# Altium PCB UNOshield.PcbDoc
Units mil, origin at the board's own origin, x right, y up, seen from the top; angles counter-clockwise.
Board outline 2700 x 2100 mil, 2 copper layers (Top Layer, Bottom Layer); 41 components, 67 nets, 164 pads, 38 vias.
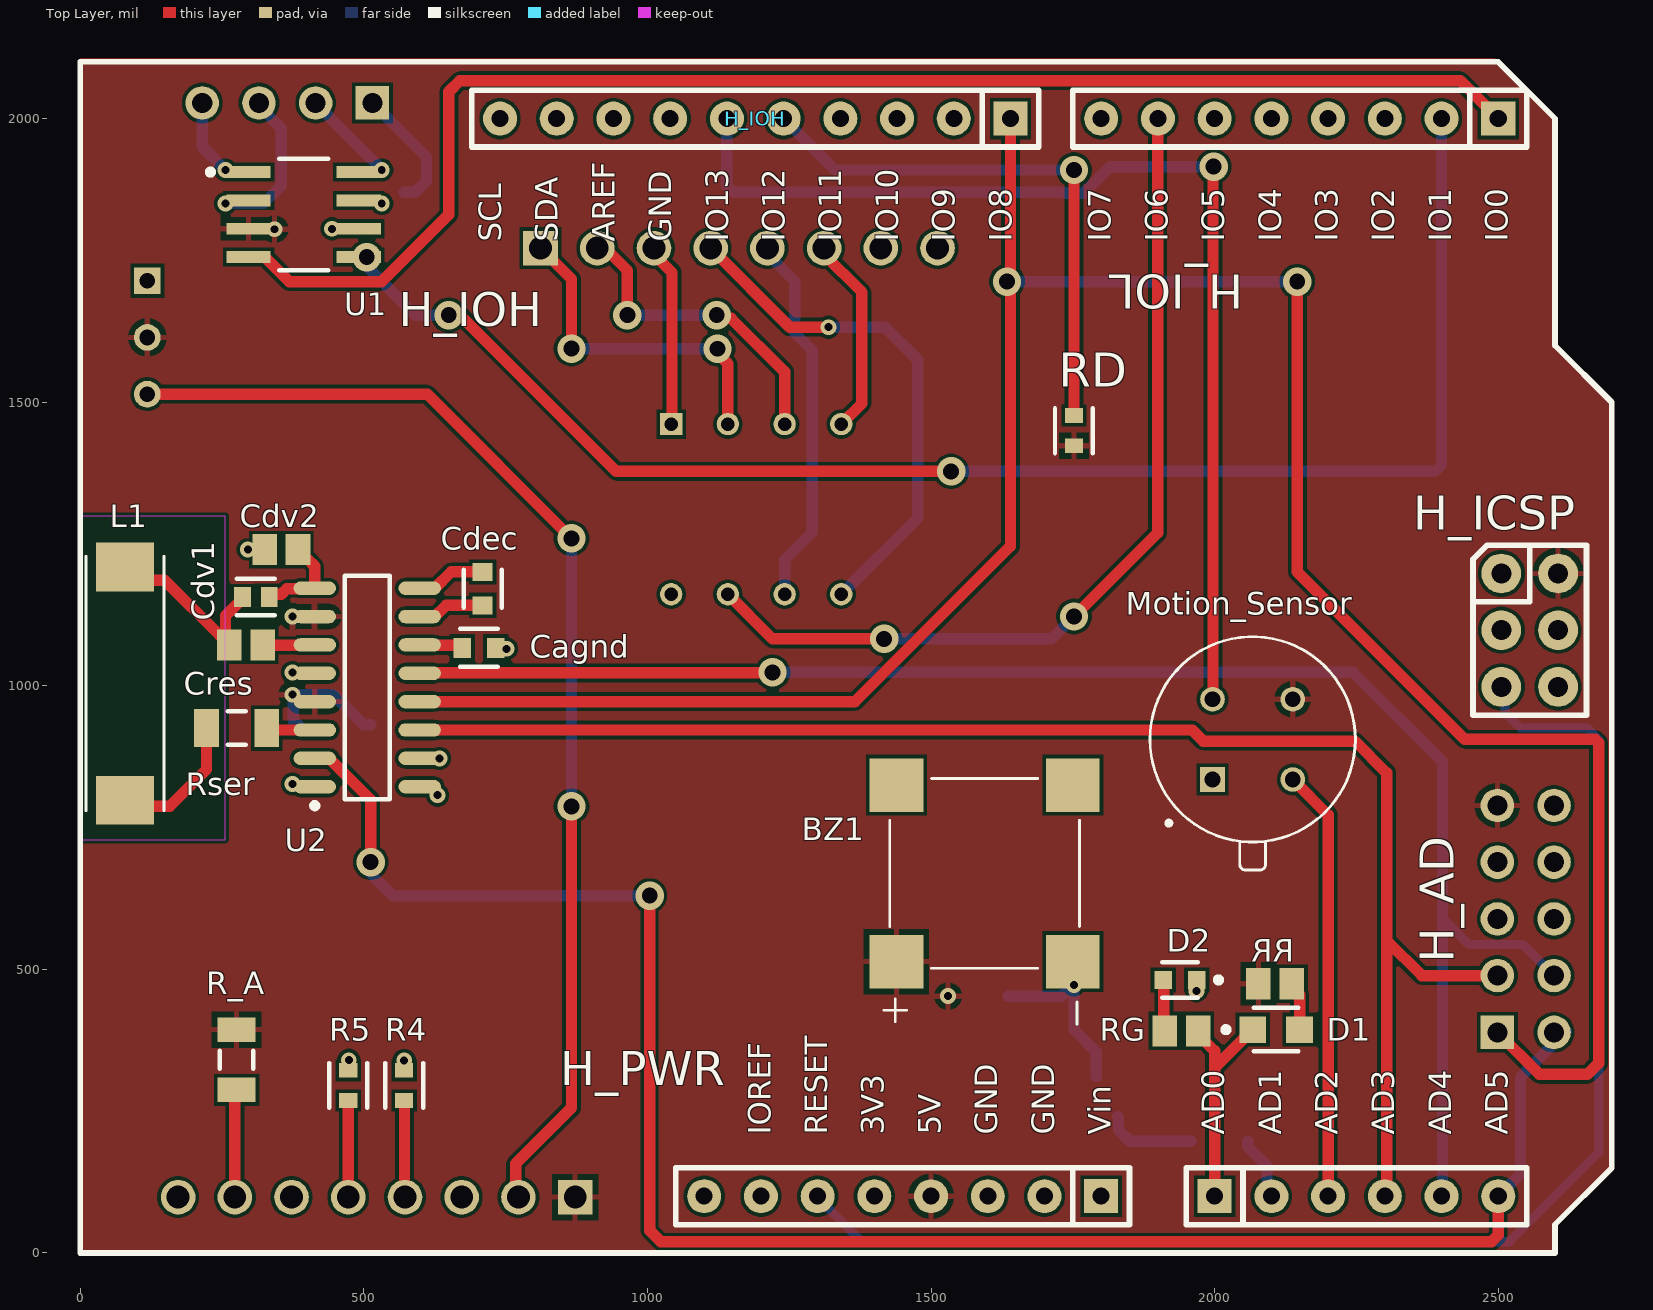
[diagram p0: Top Layer view]
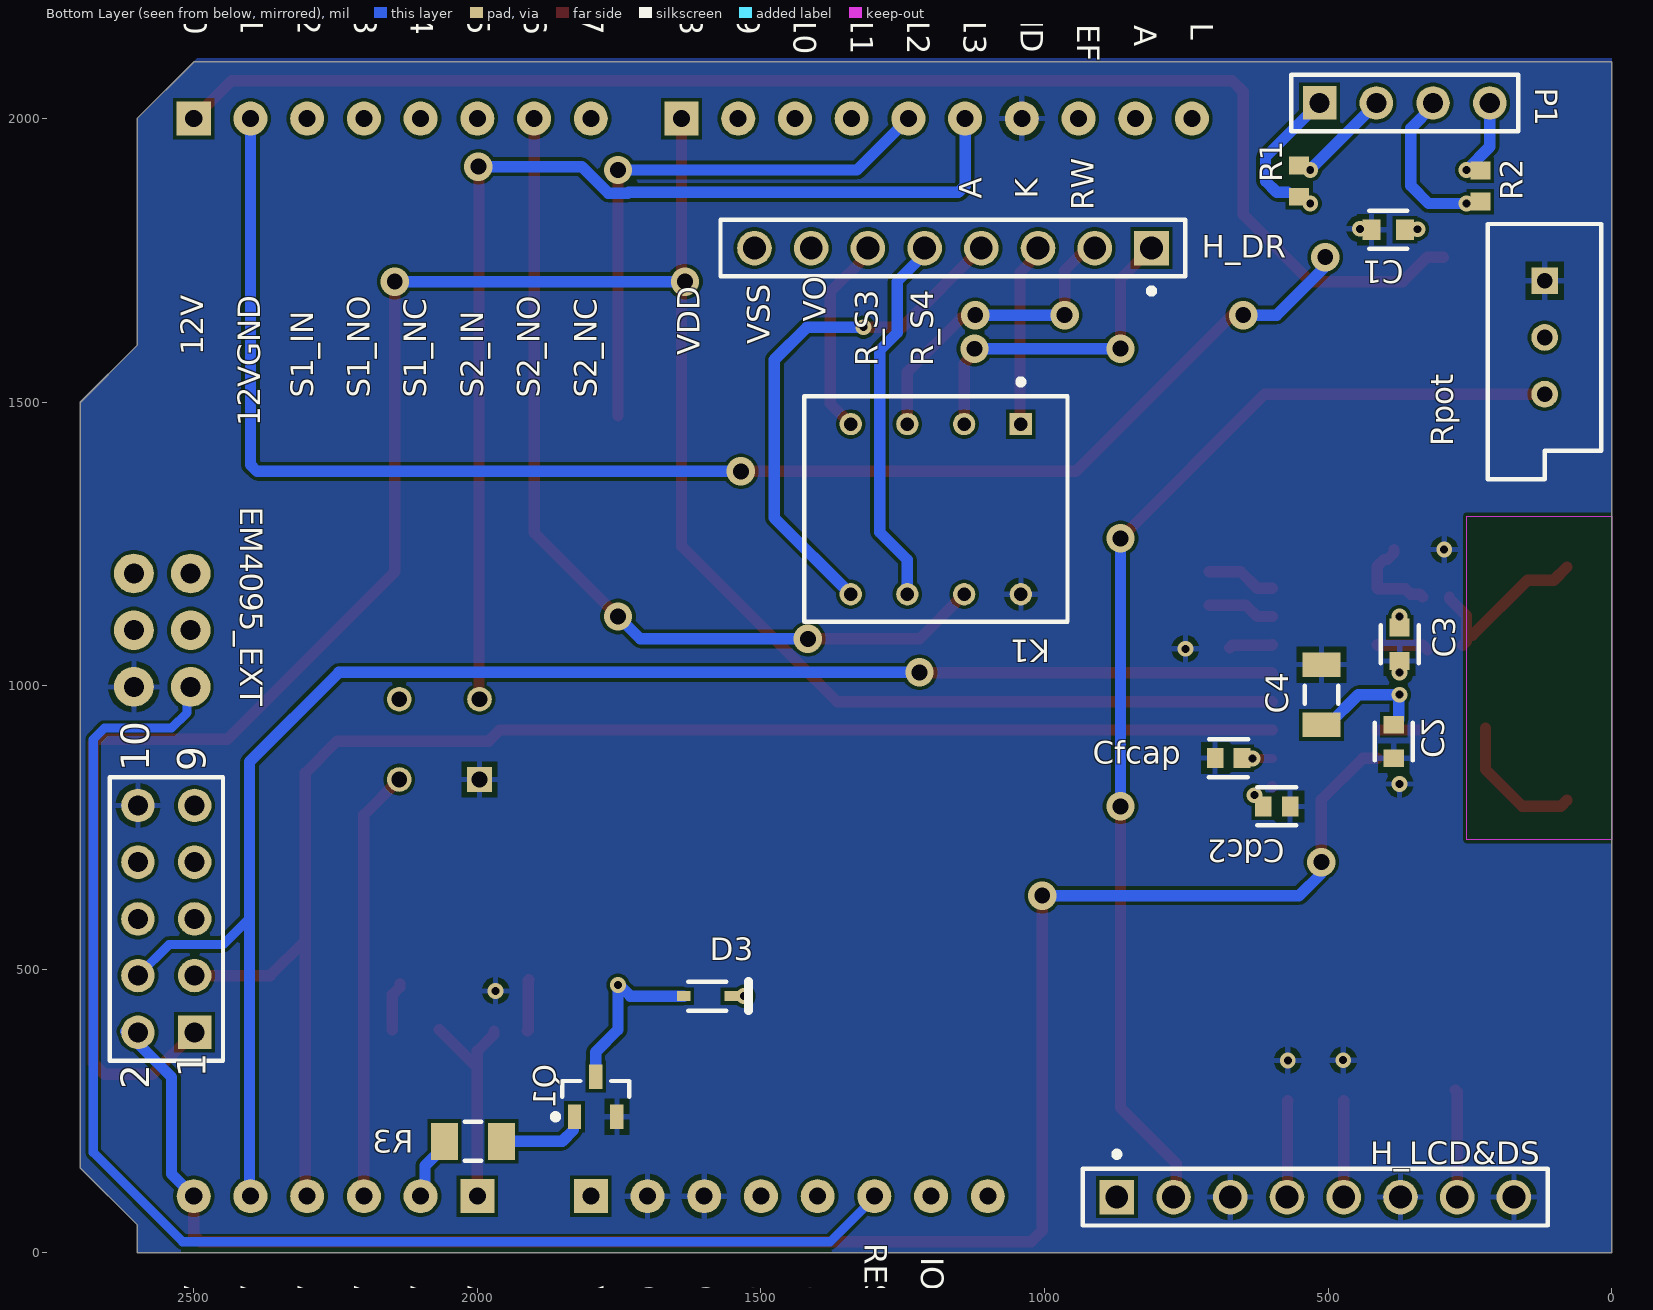
[diagram p1: Bottom Layer view, seen from below]
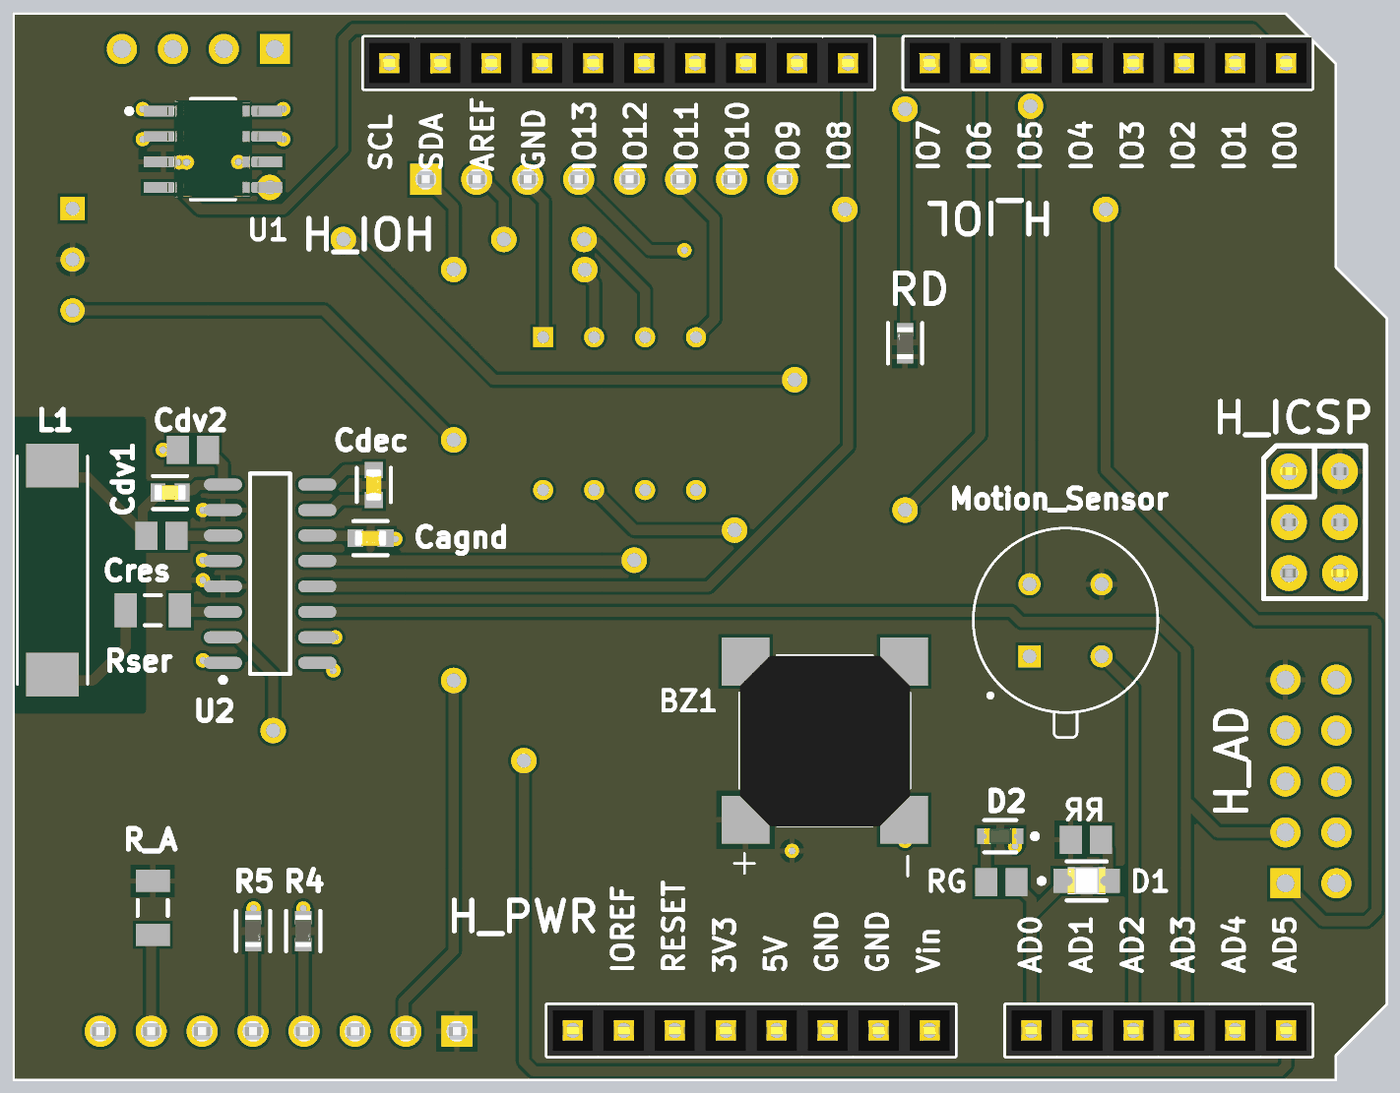
[diagram p2: 3D render of the assembled board from above, using the file's embedded part models]

## Layer stack, top to bottom
Top Solder: solder mask 0.4, Solder Resist, Dk 3.5
Top Layer: signal copper 1.4
Dielectric1: dielectric 12.6, FR-4, Dk 4.8
Bottom Layer: signal copper 1.4
Bottom Solder: solder mask 0.4, Solder Resist, Dk 3.5

## Board outline
0,0 0,2100 2500,2100 2600,2000 2600,1600 2700,1500 2700,150 2600,50 2600,0

## Design rules (kind name [scope] priority, off if disabled: settings)
Clearance [All] p1: gap=6 ignorepadtopadclearanceinfootprint=FALSE
HoleSize [All] p1: absolutevalues=TRUE maxlimit=100 minlimit=10 maxpercent=80.000 minpercent=20.000
PolygonConnect [All] p1: connectstyle=Relief reliefconductorwidth=10 reliefentries=4 polygonreliefangle="90 Angle" airgapwidth=10
RoutingVias [All] p1: holewidth=28 width=50 viastyle="Through Hole" minholewidth=10 minwidth=28 maxholewidth=50 maxwidth=50
SilkToSolderMaskClearance SilkscreenOverComponentPads [IsPad] p1: minsilkscreentomaskgap=10 clearancetoexposedcopper=TRUE
SolderMaskExpansion [All] p1: expansion=0 istentingtop=FALSE
SupplyNets "Schematic Supply Nets_3" [InNet('GND(12V)')] p1: voltage=0.000
SupplyNets "Schematic Supply Nets_1" [InNet('+12')] p2: voltage=0.000
SupplyNets "Schematic Supply Nets_2" [InNet('5V')] p3: voltage=0.000
SupplyNets "Schematic Supply Nets" [InNet('GND')] p4: voltage=0.000
Width [All] p1: maxlimit=1000 minlimit=6 preferedwidth=10 minimp=50.000000 maximp=50.000000 favimp=50.000000
28 further rules are at their usual default settings.

## Classes and differential pairs
component class EM4095: C2 C3 C4 Cagnd Cdc2 Cdec Cdv1 Cdv2 Cfcap Cres EM4095_EXT L1 Rser U2
component class MAX490: C1 P1 R1 R2 U1
component class UNOshield: BZ1 D1 D2 D3 H_AD H_DR H_ICSP H_IOH H_IOL H_LCD&DS H_PWR K1 Motion_Sensor Q1 R3 R4 R5 R_A RD RG Rpot RR

## Components (designator, comment, footprint, x,y, rotation, side; value= is the part's Value field where it differs from the comment)
BZ1 "SMT-0823-S-R" XDCR_SMT-0823-S-R 1594.49,669.29 r90 top
C1 "Bypass Capacitor" FP-CC0603-DA-MFG 393.7,1804.04 r0 bottom value="100 nF"
C2 "Bypass Capacitor" FP-CC0603-DA-MFG 384.22,901.72 r270 bottom value="100 nF"
C3 "Bypass Capacitor" FP-CC0603-DA-MFG 373.77,1073.38 r270 bottom value="100 nF"
C4 "Bypass Capacitor" C1206 511.81,984.25 r90 bottom value=100pF
Cagnd "Decoupling" FP-CC0603-DA-MFG 702.91,1066.88 r0 top value="100 nF"
Cdc2 "10nF" FP-C0603C-CF-MFG 590.55,787.4 r180 bottom value="10,000 pF"
Cdec "" FP-CC0603-DA-MFG 709.27,1171.37 r90 top value="100 nF"
Cdv1 "CBR06C729BAGAC" FP-CBR06C-MFG 309.56,1156.46 r0 top value="7.2 pF"
Cdv2 "" C0805 354.33,1240.16 r0 top value=680pF
Cfcap "10nF" FP-C0603C-CF-MFG 675.53,872.44 r0 bottom value="10,000 pF"
Cres "" C0805 292.37,1071.69 r180 top value=680pF
D1 "LS R976-NR-1" FP-LS_R976-MFG 2108.43,393.7 r0 top
D2 "LTST-C191KGKT" FP-LTST-C191KGKT-MFG 1938.79,481.46 r180 top
D3 "1N4148WS-7-F" DIOD-SOD323-2-A_V 1594.49,452.76 r180 bottom
EM4095_EXT "Header 5X2" HDR2X5 2498.43,388.98 r90 bottom
H_AD "AD" "Header 6x1 8.5mm" 2000,100 r0 top locked
H_DR "Header Door Relay" SLIN-PPPC081LFBN-RC_V 1161.42,1771.65 r0 bottom
H_ICSP "ICSP" ICSP 2505.51,1198.03 r0 top locked
H_IOH "IOH" "Header 10x1 8.5mm" 1640,2000 r180 top locked
H_IOL "IOL" "Header 8x1 8.5mm" 2500,2000 r180 top locked
H_LCD&DS "Header LCD & Door Sensor" SLIN-PPPC081LFBN-RC_V 522.44,98.43 r180 bottom
H_PWR "POWER_UNO" "Header 8x1 8.5mm" 1800,100 r180 top locked
K1 "Relay-DPDT" DIP-P8 1191.73,1311.42 r0 bottom
L1 "B82450A2364A000" INDM11435X240N 78.74,1003.94 r270 top
Motion_Sensor "PYQ_1548/7660" TO254P940H440-4 2066.93,905.51 r90 top
P1 "Header 4" HDR1X4 514.96,2027.56 r180 bottom
Q1 "NX7002AK,215" NXP-SOT23_L 1791.34,275.59 r90 bottom
R1 "" 1608[0603] 551.18,1889.76 r270 bottom value=120
R2 "" 1608[0603] 231.54,1881.11 r270 bottom value=120
R3 "RMCF1206FT10R0" FP-RMCF1206-IPC_C 2007.87,196.85 r180 bottom
R4 "10k" FP-RC0603-0_55-IPC_C 570.87,295.28 r270 top
R5 "10k" FP-RC0603-0_55-IPC_C 472.44,295.28 r270 top
R_A "Res1" C1206 275.59,340.55 r90 top value=220 (schematic designator R_a)
RD "10k" FP-RC0603-0_55-IPC_C 1751.97,1449.74 r90 top
RG "Res1" C0805 1941.23,391.4 r0 top value=150
Rpot "RPot" VR5 118.11,1614.17 r270 bottom value=10k
RR "Res1" C0805 2106.75,474.57 r180 top value=150
Rser "Res1" C1206 275.59,925.2 r0 top value=10
U1 "MAX490ESA+" FP-S8-2-MFG 393.7,1830.71 r0 top
U2 "EM4095HMSO16B+" SOIC16_L 505.91,997.05 r0 top

## Footprints (in the part's own frame and the unit in brackets; to place one, negate y for a bottom-side part, rotate by r counter-clockwise, add the part's x,y. Pads: shape width x height; smd on the part's side, far side on the other; paste and mask are expansions set on the pad)
1608[0603] [mm] "Chip Capacitor, Body 1.6x0.8mm, IPC High Density"
  rect 0.8x0.9 smd: 1(-0.7,0) 2(0.7,0)
  body extent -0.87,-0.48 0.87,0.48, height 1.3
C0805 [mm] "Chip Capacitor, Body 2.0x1.3mm, IPC High Density"
  rect 1.1x1.4 smd: 1(-0.75,0) 2(0.75,0)
  body extent -1.1,-0.72 1.1,0.72, height 1.4
C1206 [mm] "Chip Capacitor, Body 3.2x1.6mm, IPC High Density"
  rect 1.1x1.7 smd: 1(-1.35,0) 2(1.35,0)
  silkscreen extent -0.4,-0.75 0.4,0.75, body extent -1.7,-0.9 1.7,0.9, height 1.3
DIOD-SOD323-2-A_V [mm] "SOD-323, 2-Leads, Body 1.7x1.3mm"
  rect 0.59x0.45 smd: 1(-1.055,0) 2(1.055,0)
  silkscreen extent -0.85,-0.65 1.85,0.65, body extent -0.85,-0.65 0.85,0.65, height 1.2
DIP-P8 [mm] "Dual-Pole Dual-Throw Relay; 8 Leads"
  rect 1x1 hole 0.6: 1(-3.81,-3.81)
  round 1 hole 0.6: 2(-1.27,-3.81) 3(1.27,-3.81) 4(3.81,-3.81) 5(3.81,3.81) 6(1.27,3.81) 7(-1.27,3.81) 8(-3.81,3.81)
  silkscreen extent -5.9,-5.82 5.9,5.05
FP-C0603C-CF-MFG [mm]
  rect 0.75x0.9 smd paste+0 mask+0: 1(-0.6,0) 2(0.6,0)
  silkscreen extent -0.87,-0.85 0.88,0.85, body extent -0.8,-0.4 0.8,0.4, height 0.87
FP-CBR06C-MFG [mm]
  rect 0.75x0.9 smd paste+0 mask+0: 1(-0.6,0) 2(0.6,0)
  silkscreen extent -0.85,-0.82 0.85,0.82, body extent -0.8,-0.4 0.8,0.4, height 0.87
FP-CC0603-DA-MFG [mm]
  rect 0.8x0.9 smd paste+0 mask+0: 1(-0.75,0) 2(0.75,0)
  silkscreen extent -0.85,-0.85 0.85,0.85, body extent -0.8,-0.4 0.8,0.4, height 0.9
FP-LS_R976-MFG [mm]
  rect 1.2x1.2 smd paste+0 mask+0: 1(-1.05,0) 2(1.05,0)
  silkscreen extent -2.37,-0.97 1,0.97, body extent -0.95,-0.68 0.95,0.67, height 0.9
FP-LTST-C191KGKT-MFG [mm]
  rect 0.8x0.8 smd paste+0 mask+0: 1(-0.75,0) 2(0.75,0)
  silkscreen extent -1.85,-0.8 0.8,0.8, body extent -1.25,-0.55 1.25,0.55, height 0.25
FP-RC0603-0_55-IPC_C [mil]
  rect 25.93x31.97 smd paste+0 mask+0: 1(-26.64,0) 2(26.64,0)
  silkscreen extent -40,-33 40,33, body extent -31,-16 31,16, height 22
FP-RMCF1206-IPC_C [mil]
  rect 47.39x65.28 smd paste+0 mask+0: 1(-50.22,0) 2(50.22,0)
  silkscreen extent -15,-34 15,34, body extent -63,-31 63,31, height 28
FP-S8-2-MFG [mm]
  rect 1.98x0.53 smd paste+0 mask+0: 1(-2.465,1.905) 2(-2.465,0.635) 3(-2.465,-0.635) 4(-2.465,-1.905) 5(2.465,-1.905) 6(2.465,-0.635) 7(2.465,0.635) 8(2.465,1.905)
  silkscreen extent -4.3,-2.5 1.1,2.5, body extent -3,-2.45 3,2.45, height 1.75
HDR1X4 [mm] "Connector; Header; 4 Position"
  rect 1.5x1.5 hole 0.9: 1(0,0)
  round 1.5 hole 0.9: 2(2.54,0) 3(5.08,0) 4(7.62,0)
  silkscreen extent -1.27,-1.27 8.89,1.27
HDR2X5 [mm] "Connector; Header; 5x2 Position"
  rect 1.5x1.5 hole 0.9: 1(0,0)
  round 1.5 hole 0.9: 2(0,2.54) 3(2.54,0) 4(2.54,2.54) 5(5.08,0) 6(5.08,2.54) 7(7.62,0) 8(7.62,2.54) 9(10.16,0) 10(10.16,2.54)
  silkscreen extent -1.27,-1.27 11.43,3.81
"Header 6x1 8.5mm" [mil] "Stackable 6 pin header"
  rect 60x60 hole 30: 1(0,0)
  round 60 hole 30: 2(100,0) 3(200,0) 4(300,0) 5(400,0) 6(500,0)
  silkscreen extent -50,-50 550,50, body extent -50,-50 550,50, height 335
"Header 8x1 8.5mm" [mil] "Stackable 8 pin header"
  rect 60x60 hole 30: 1(0,0)
  round 60 hole 30: 2(100,0) 3(200,0) 4(300,0) 5(400,0) 6(500,0) 7(600,0) 8(700,0)
  silkscreen extent -50,-50 750,50, body extent -50,-50 750,50, height 335
"Header 10x1 8.5mm" [mil] "Stackable 10 pin header"
  rect 60x60 hole 30: 1(0,0)
  round 60 hole 30: 2(100,0) 3(200,0) 4(300,0) 5(400,0) 6(500,0) 7(600,0) 8(700,0) 9(800,0) 10(900,0)
  silkscreen extent -50,-50 950,50, body extent -50,-50 950,50, height 335
ICSP [mil]
  round 70 hole 35.43: 1(0,0) 2(100,0) 3(0,-100) 4(100,-100) 5(0,-200) 6(100,-200)
  silkscreen extent -50,-250 150,50, body extent -50,-250 150,50, height 485
INDM11435X240N [mm]
  rect 2.18x2.61 smd: 1(-5.22,0) 2(5.22,0)
  silkscreen extent -5.7,-1.75 5.7,1.75
NXP-SOT23_L [mm] "SOT23, 3-Leads, Body 3x1.4mm, Pitch 0.95mm, IPC High Density"
  rect 1.1x0.6 smd: 1(-0.9,0.95) 2(-0.9,-0.95) 3(0.9,0)
  silkscreen extent -1.02,-1.5 0.7,1.93, body extent -0.7,-1.5 0.7,1.5, height 1.1
SLIN-PPPC081LFBN-RC_V [mm] "THD, 8-Leads, Body 20.82x2.54mm, Pitch 2.54mm"
  rect 1.55x1.55 hole 1.02: 1(-8.89,0)
  round 1.55 hole 1.02: 2(-6.35,0) 3(-3.81,0) 4(-1.27,0) 5(1.27,0) 6(3.81,0) 7(6.35,0) 8(8.89,0)
  silkscreen extent -10.41,-1.27 10.41,2.04, body extent -10.41,-1.27 10.41,1.27, height 8.5
SOIC16_L [mm] "SOIC, 16-Leads, Body 9.9x3.9mm, Pitch 1.27mm, IPC High Density"
  oval 1.9x0.6 smd: 1(-2.35,-4.445) 2(-2.35,-3.175) 3(-2.35,-1.905) 4(-2.35,-0.635) 5(-2.35,0.635) 6(-2.35,1.905) 7(-2.35,3.175) 8(-2.35,4.445) 9(2.35,4.445) 10(2.35,3.175) 11(2.35,1.905) 12(2.35,0.635) 13(2.35,-0.635) 14(2.35,-1.905) 15(2.35,-3.175) 16(2.35,-4.445)
  silkscreen extent -2.47,-5.42 1,5, body extent -2,-5 2,5, height 1.91
TO254P940H440-4 [mm]
  rect 1.1x1.1 hole 0.7: 1(-1.796,1.796)
  round 1.1 hole 0.7: 2(-1.796,-1.796) 3(1.796,-1.796) 4(1.796,1.796)
  silkscreen extent -5.85,-4.6 4.6,4.6
VR5 [mm] "Thru-Hole; 3 Leads"
  rect 1.2x1.2 hole 0.7: 1(-2.54,0)
  round 1.2 hole 0.7: 2(0,0) 3(2.54,0)
  silkscreen extent -5.08,-2.54 6.35,2.54
XDCR_SMT-0823-S-R [mm]
  rect 2.4x2.4 smd: 3(3.95,-3.95) 4(3.95,3.95) N(-3.95,-3.95) P(-3.95,3.95)
  silkscreen extent -6.76,-4.25 4.25,4.51, body extent -4.27,-4.26 4.23,4.24, height 2.19

## Part data
BZ1: "Audio Indicator Transducer Electromagnetic 5Vp-p 70mA Solder Pad 3Vp-p 1800Hz to 2800Hz Surface Mount", Manufacturer="Projects Unlimited", Package=None, Supplier Part Number=668-1066-1-ND, Availability=Unavailable, Category="Audio Products", ComponentLink1Description=https://datasheet.ciiva.com/4625/smt-0823-s-r-71464-4625676.pdf?src-supplier=Mouser, ComponentLink1URL=https://datasheet.ciiva.com/4625/smt-0823-s-r-71464-4625676.pdf?src-supplier=Mouser, ComponentLink2Description=https://datasheet.ciiva.com/8113/smt-0823-s-r-8113345.pdf?src-supplier=Avnet, ComponentLink2URL=https://datasheet.ciiva.com/8113/smt-0823-s-r-8113345.pdf?src-supplier=Avnet, ComponentLink3Description=https://datasheet.ciiva.com/0/smt-0823-s-r-315.pdf?src-supplier=Digikey, ComponentLink3URL=https://datasheet.ciiva.com/0/smt-0823-s-r-315.pdf?src-supplier=Digikey, Manufacturer Part Number=SMT-0823-S-R, MF="PUI Audio", MP=SMT-0823-S-R, Price=None, Pricing="1=3.22, 10=2.625, 25=2.4196, 50=2.275, 100=2.1395, 250=1.97344, 500=1.85702 (USD)", RoHS=Yes, Stock=12556, Supplier=Digikey
C1 C2 C3 Cagnd Cdec: library part CMP-03422-001228-1, "CAP CER 0.1UF 10V X7R 0603", Capacitance="100 nF", Manufacturer=YAGEO, Manufacturer Part Number=CC0603KRX7R6BB104, Package=CC0603-DA, Temperature="-55°C to +125°C", Temperature Characteristic=X7R, Temperature Coefficient=15%, Temperature Range High=+125°C, Temperature Range Low=-55°C, Tolerance=0.1, Voltage="10 V", Automotive=No, Category=Cap, ComponentLink2Description=Datasheet, ComponentLink2URL=http://www.yageo.com/documents/recent/UPY-GPHC_X7R_6.3V-to-50V_18.pdf, Device Class L1="Passive Components", Device Class L2=Capacitors, Device Class L3="Ceramic Capacitors", Digikey Description="CAP CER 0.1UF 10V X7R 0603", Footprint Url=http://www.yageo.com/exep/pages/download/literatures/UPY-C_GEN_24.pdf, Height=0.9mm, Lead Free=Yes, Material=Ceramic, Mouser Description="0603 0.1 uF 10 V ±10 % Tolerance X7R SMT Multilayer Ceramic Capacitor", Octopart=https://octopart.com/cc0603krx7r6bb104-yageo-9291607, RoHS=TRUE, Voltage Rating="10 V"
C4: library part "Cap Pol1", "Tantalum Capacitor, Polarized, Tantalum (dry/solid), 16V, 10% +Tol, 10% -Tol, 10uF, Surface Mount, 1206", Capacitor Type=Tantalum, Case/Package=1206, ESR (Equivalent Series Resistance)=3R, Leakage Current=1.6uA, Manufacturer="Kyocera AVX", Manufacturer Part Number=TAJA106K016SNJ, Max Operating Temperature=125°C, Min Operating Temperature=-55°C, Package Shape=Rectangular, Package Style=SMTMeter, Rated DC Voltage (URdc)=16V, Supplier Part Number 1=478-8875-1-ND, Tolerance  (fill in as +-)=10%, Category="Tantalum Capacitors", ComponentLink1Description=https://datasheet.ciiva.com:443/pdfs/VipMasterIC/IC/AVXC/AVXC-S-A0008794508/AVXC-S-A0008794508-1.pdf?src-supplier=IHS+Markit, ComponentLink1URL=https://datasheet.ciiva.com:443/pdfs/VipMasterIC/IC/AVXC/AVXC-S-A0008794508/AVXC-S-A0008794508-1.pdf?src-supplier=IHS+Markit, ComponentLink2Description=https://datasheet.ciiva.com/29500/taj-29500092.pdf?src-supplier=Digikey, ComponentLink2URL=https://datasheet.ciiva.com/29500/taj-29500092.pdf?src-supplier=Digikey, ComponentLink3Description=https://datasheet.ciiva.com/29500/taj-29500093.pdf?src-supplier=Digikey, ComponentLink3URL=https://datasheet.ciiva.com/29500/taj-29500093.pdf?src-supplier=Digikey, ComponentLink4Description=https://datasheet.ciiva.com/29500/taj-29500094.pdf?src-supplier=Digikey, ComponentLink4URL=https://datasheet.ciiva.com/29500/taj-29500094.pdf?src-supplier=Digikey, ComponentLink5Description=https://datasheet.ciiva.com/12907/taj-27497-12907453.pdf?src-supplier=Mouser, ComponentLink5URL=https://datasheet.ciiva.com/12907/taj-27497-12907453.pdf?src-supplier=Mouser, Dielectric Material=Tantalum, Height=1.6mm, JESD-609 Code=e3, Length=3.2mm, Mounting Technology="Surface Mount", Packaging="Tape and Reel", Pins=2, Polarity=Polarized, Pricing 1="1=0.36, 10=0.214, 50=0.157, 100=0.1397, 500=0.11036, 1000=0.10132, 2500=0.09178 (USD)", Reach SVHC Compliant=Yes, Reference Standard=CECC30801-005, RoHS=Yes, RoHS Compliant=Yes, Stock 1=30440, Supplier 1=Digikey, Tan Delta=0.08, Terminal Finish=Nickel, Termination="J BEND", Tolerance (fill in as +-)=10%, Width=1.6mm
Cdc2 Cfcap: library part CMP-2006-03048-2, "CAP CER 10000PF 10V X7R 0603", Capacitance="10,000 pF", Manufacturer=KEMET, Manufacturer Part Number=C0603C103K8RACTU, Package=C0603C-CF, Temperature="-55°C to +125°C", Temperature Characteristic=X7R, Temperature Coefficient=30ppm/°C, Temperature Range High=+125°C, Temperature Range Low=-55°C, Tolerance=0.1, Voltage Rating="10 V", Automotive=Yes, Automotive Grade="Grade 1", Category=Cap, ComponentLink2Description=Datasheet, ComponentLink2URL=https://api.kemet.com/component-edge/download/datasheet/C0603C100J5GACAUTO.pdf, Device Class L1="Passive Components", Device Class L2=Capacitors, Device Class L3="Ceramic Capacitors", Digikey Description="CAP CER 10000PF 10V X7R 0603", Height=0.87mm, Lead Free=Yes, Material=Ceramic, Mouser Description="Multilayer Ceramic Capacitors MLCC - SMD/SMT 10volts 10000pF X7R 10%", Octopart=https://octopart.com/c0603c103k8ractu-kemet-8375724, RoHS=TRUE
Cdv1: library part CMP-03020-004850-1, "CBR0603 7.2 pF C0G 30ppm/°C 0.1 pF 250 V", Capacitance="7.2 pF", Capacitor Type=Ceramic, Case/Package=0603, Manufacturer=KEMET, Max Operating Temperature=125°C, Min Operating Temperature=-55°C, Package=CBR06C, Package Style=SMTMeter, Rated DC Voltage (URdc)=250V, Supplier Part Number 1=399-16240-1-ND, Temperature="-55°C to +125°C", Temperature Characteristic=C0G, Temperature Coefficient=30ppm/°C, Temperature Range High=+125°C, Tolerance="0.1 pF", Tolerance  (fill in as +-)=1.3889%, Voltage Rating="250 V", Automotive=No, Category=Cap, ComponentLink1Description=https://datasheet.ciiva.com:443/pdfs/VipMasterIC/IC/KEME/KEME-S-A0008534334/KEME-S-A0008534334-1.pdf?src-supplier=IHS+Markit, ComponentLink1URL=https://datasheet.ciiva.com:443/pdfs/VipMasterIC/IC/KEME/KEME-S-A0008534334/KEME-S-A0008534334-1.pdf?src-supplier=IHS+Markit, ComponentLink2Description=Datasheet, ComponentLink2URL=https://content.kemet.com/datasheets/KEM_C1030_CBR_SMD.pdf, ComponentLink3Description=https://datasheet.octopart.com/CBR06C729BAGAC-KEMET-datasheet-86449590.pdf?src-supplier=Element14, ComponentLink3URL=https://datasheet.octopart.com/CBR06C729BAGAC-KEMET-datasheet-86449590.pdf?src-supplier=Element14, Device Class L1="Passive Components", Device Class L2=Capacitors, Device Class L3="Ceramic Capacitors", Dielectric Material=Ceramic, Height=0.87mm, Ipc Land Pattern Name=CAPC16080X80, JESD-609 Code=e3, Lead Free=Yes, Length=1.6mm, Manufacturer Part Number=CBR06C729BAGAC, Material=Ceramic, Multilayer=Yes, Octopart=https://octopart.com/cbr06c729bagac-kemet-84758813, Packaging="Tape and Reel", Pins=2, Pricing 1="1=0.8, 10=0.501, 100=0.3498, 1000=0.27097 (USD)", Reach SVHC Compliant=Yes, RoHS=TRUE, RoHS Compliant=Yes, Stock 1=3890, Supplier 1=Digikey, Temperature Characteristics Code=C0G, Temperature Range Low=-55°C, Terminal Finish=Tin, Tolerance (fill in as +-)=1.3889%, Width=0.8mm
Cdv2 Cres: library part Cap, "Surface Mount Ceramic Multilayer Capacitor 680pF 10% X7R 500V 0805 Paper T/R", Manufacturer=Yageo, Manufacturer Part Number=CC0805KRX7RBBB681, Supplier Part Number 1=13-CC0805KRX7RBBB681CT-ND, Category="Ceramic Capacitors", Pricing 1="1=0.12, 10=0.068, 100=0.0409, 1000=0.0271 (USD)", RoHS=No, Stock 1=6677, Supplier 1=Digikey
D1: library part CMP-62016-000037-1, "LED RED DIFFUSED 0805 SMD", Case Code (Imperial)=0805, Case Code (Metric)=2012, Color=Red, Forward Current=25mA, Forward Voltage=2.5V, Lens Color=White, Max Operating Temperature=85°C, Min Operating Temperature=-30°C, Package Quantity=16000, Power Dissipation=65W, Reverse Voltage=12V, Test Current=20mA, Case/Package=0805, Depth=1.35mm, Dominant Wavelength=633nm, Height=0.9mm, Illumination Color=Red, Length=2mm, Lens Size=1.25mm, Lens Style=Flat, Lens Transparency=Diffused, Luminous Flux=0.47lm, Luminous Intensity=180mcd, Mount="Surface Mount", Number of Elements=1, Number of LEDs=1, Number of Pins=2, Packaging="Tape and Reel", Radiation Hardening=No, Viewing Angle=160°, Width=1.25mm
D2: library part CMP-2000-05198-4, Case Code (Imperial)=0603, Case Code (Metric)=1608, Color=Green, Forward Current=20mA, Forward Voltage=2V, Lens Color="Clear, Colorless", Max Operating Temperature=85°C, Min Operating Temperature=-55°C, Power Dissipation=75mW, Reverse Voltage=5V, Case/Package=0603, Depth=800µm, Dominant Wavelength=571nm, Height=550µm, Illumination Color=Green, Lead Free="Lead Free", Length=1.6mm, Lens Style=Clear, Lens Transparency=Clear, Luminous Intensity=35mcd, Mount="Surface Mount", NexarPartId=549907, Number of Elements=1, Number of LEDs=1, Number of Pins=2, Packaging="Tape and Reel", Power Rating=75mW, Radiation Hardening=No, RoHS=Compliant, Schedule B="8541402000, 8541402000", Test Current=20mA, Viewing Angle=130°, Wavelength=574nm, Width=800µm
D3: library part CMP-1667-00004-1, "Fast Switching Diode, 75 V, 0.3 A, -65 to 150 degC, 2-Pin SOD323, RoHS, Tape and Reel", ComponentLink1Description="Manufacturer URL", ComponentLink1URL=http://www.diodes.com/, ComponentLink2Description=Datasheet, ComponentLink2URL=http://www.diodes.com/datasheets/ds30097.pdf, DatasheetVersion="Rev. 25-2, 03/2016", PackageDescription="2-Pin Small Outline Diode, Body 1.7 x 1.3 mm", PackageReference=SOD323-2
EM4095_EXT: "Header, 5-Pin, Dual row", LatestRevisionDate=17-Jul-2002, LatestRevisionNote="Re-released for DXP Platform.", Publisher="Altium Limited"
H_AD: Supplier Part Number 1=2699089, Supplier 1=Arrow, Supplier 2=Digi-Key, Supplier 3=Arrow, Supplier 4=Arrow, Supplier Part Number 2=SAM1198-06-ND, Supplier Part Number 3=2699088, Supplier Part Number 4=2699075
H_DR H_LCD&DS: library part CMP-002-00028-2, "Female Header, Pitch 2.54 mm, 1 x 8 Position, Height 8.5 mm, Tail Length 3.2 mm, -40 to 105 degC, RoHS, Bulk", Case/Package=PPPC081LFBN-RC, Manufacturer=Sullins, Max Operating Temperature=105°C, Min Operating Temperature=-40°C, Package Description="Female Header, Pitch 2.54 mm, 1 x 8 Position, Height 8.5 mm, Tail Length 3.2 mm", Connector Type=Header, Datasheet URL=http://sullinscorp.com/catalogs/101_PAGE114-115_.100_FEMALE_HDR.pdf, Datasheet Version=Jan-15, Gender=Female, Mounting Technology=TH, Package Reference=PPPC081LFBN-RC, RoHS Compliant=Unknown
H_ICSP: Supplier Part Number 1=2699117, Supplier 1=Arrow, Supplier 2=Arrow, Supplier 3=Digi-Key, Supplier 4=Arrow, Supplier 5=Digi-Key, Supplier Part Number 2=2699116, Supplier Part Number 3=SAM1185-06-ND, Supplier Part Number 4=2699091, Supplier Part Number 5=SAM1196-06-ND
H_IOH: Supplier Part Number 1=2698803S4475693N1004, Supplier 1=Arrow, Supplier 2=Digi-Key, Supplier 3=Arrow, Supplier Part Number 2=SAM1198-10-ND, Supplier Part Number 3=2698789
H_IOL H_PWR: Supplier Part Number 1=SAM1198-08-ND, Supplier 1=Digi-Key, Supplier 2=Arrow, Supplier 3=Arrow, Supplier 4=Arrow, Supplier Part Number 2=2698939, Supplier Part Number 3=2698940, Supplier Part Number 4=2698925
K1: "Dual-Pole Dual-Throw Relay", LatestRevisionDate=17-Jul-2002, LatestRevisionNote="Re-released for DXP Platform.", PackageDescription="Relay; 8 Leads", PackageReference=DIP-P8, Published=24-Mar-1999, Publisher="Altium Limited"
L1: Package=None, Availability=Unavailable, MP=B82450A2364A000, Price=None
Motion_Sensor: "Sensor PIR _Passive Infrared_ Low Power TO-5 Variant, 4 Leads, Lens Top Metal Can", Package="TO-5 Excelitas Technologies", Availability=Unavailable, MF="Excelitas Technologies", MP="PYQ 1548/7660", Price=None, SnapEDA_Link=https://www.snapeda.com/parts/PYQ%201548/7660/Excelitas%20Technologies/view-part/4328334/?ref=snap
P1: "Pin Header, Thr, Single Row, .10", Manufacturer="METZ CONNECT", Manufacturer Part Number=PR20204VBNN, Supplier Part Number 1=1849-PR20204VBNN-ND, Category=Connectors, LatestRevisionDate=17-Jul-2002, LatestRevisionNote="Re-released for DXP Platform.", Pricing 1="1=0.1, 10=0.052, 100=0.044, 500=0.03926, 1000=0.03738, 5000=0.03336, 10000=0.03176 (USD)", Publisher="Altium Limited", RoHS=No, Stock 1=15957, Supplier 1=Digikey
Q1: library part CMP-1258-00137-1, "Single N-Channel Trench MOSFET, 60 V, -55 to 150 degC, 3-Pin SOT23, Tape and Reel", Manufacturer="NXP Semiconductors", Channel Type=N, Ciss [typ] (pF)=11, Code_JEDEC=TO-236AB, ComponentLink1Description="Manufacturer URL", ComponentLink1URL=http://www.nxp.com/, ComponentLink2Description=Datasheet, ComponentLink2URL=http://www.nxp.com/documents/data_sheet/NX7002AK.pdf, ComponentLink3Description="Package Specification", ComponentLink3URL=http://www.nxp.com/documents/outline_drawing/sot023_po.pdf, Coss [typ] (pF)=3.4, DatasheetVersion="Rev. 5", Mounting Technology="Surface Mount", PackageDescription="3-Pin Small Outline Transistor Package, Body 2.9 x 1.3 mm, Pitch 0.95 mm", PackageReference=SOT23, PackageVersion="06-03-16, 03/2006", Packing="Tape & Reel", PartNumber=NX7002AK,215, VDS [max] (V)=60, VGSth [typ] (V)=1.6
R1 R2: library part Res1, "SMD Chip Resistor, 120 Ohm, ± 5%, 250 mW, 0603 [1608 Metric], Thick Film, Anti-Surge", Manufacturer=Panasonic, Manufacturer Part Number=ERJ-PA3J121V, Supplier Part Number 1=P120BZCT-ND, Category="Chip SMD Resistors", ComponentLink1Description=https://industrial.panasonic.com/cdbs/www-data/pdf/RDO0000/AOA0000C331.pdf?src-supplier=Digikey, ComponentLink1URL=https://industrial.panasonic.com/cdbs/www-data/pdf/RDO0000/AOA0000C331.pdf?src-supplier=Digikey, ComponentLink2Description=https://industrial.panasonic.com/ww/system/files/data/download/catalog/id_fixed-resistors_e_1.pdf?src-supplier=Digikey, ComponentLink2URL=https://industrial.panasonic.com/ww/system/files/data/download/catalog/id_fixed-resistors_e_1.pdf?src-supplier=Digikey, ComponentLink3Description=https://datasheet.octopart.com/ERJ-PA3J121V-Panasonic-datasheet-62096642.pdf?src-supplier=Future+Electronics, ComponentLink3URL=https://datasheet.octopart.com/ERJ-PA3J121V-Panasonic-datasheet-62096642.pdf?src-supplier=Future+Electronics, Pricing 1="1=0.12, 10=0.056, 50=0.0358, 100=0.0301, 500=0.02112, 1000=0.01854 (USD)", RoHS=Yes, Stock 1=57610, Supplier 1=Digikey
R3: library part CMP-26527-000112-1, "RES 10 OHM 1% 1/4W 1206", Case Code (Imperial)=1206, Case Code (Metric)=3216, Max Operating Temperature=155°C, Max Power Dissipation=250mW, Min Operating Temperature=-55°C, Resistance=10R, Resistor Type="Thick Film", Temperature Coefficient=100ppm/°C, Tolerance=1%, Working Voltage=200V, Case/Package=1206, Construction=Rectangular, Contact Plating=Tin, Depth=1.6mm, Features="Automotive AEC-Q200", Height=0.028inch, Lead Free="Lead Free", Length=3.2mm, Military Standard=Not, Mount="Surface Mount", Number of Terminations=2, Packaging="Tape and Reel", Power Rating=250mW, Radiation Hardening=No, RoHS Compliant=Yes, Series=RMCF, Width=0.063inch
R4 R5 RD: library part CMP-2100-03664-2, "RES 10K OHM 1% 1/10W 0603", Case Code (Imperial)=0603, Case Code (Metric)=1608, Max Operating Temperature=155°C, Max Power Dissipation=100mW, Min Operating Temperature=-55°C, Resistance=10kR, Resistance Tolerance=1%, Resistor Type="Thick Film", Temperature Coefficient=100ppm/°C, Voltage Rating=75V, Voltage Rating (DC)=50V, Case/Package=0603, Construction=Rectangular, Depth=0.8mm, Features="Moisture Resistant", Height=0.45mm, Lead Free="Lead Free", Lead Pitch=0.3mm, Length=1.6mm, Military Standard=Not, Number of Pins=2, Number of Terminations=2, Packaging="Tape and Reel", Power Rating=100mW, RoHS Compliant=Yes, Series=RC, Size Code=0603, Termination=SMD/SMT, Tolerance=1%, Weight=7.1E-05oz, Width=0.8mm
R_A: "Fixed Resistor, Metal Glaze/thick Film, 0.25W, 220ohm, 200V, 1% +/-Tol, 100ppm/Cel, Surface Mount, 1206", Case/Package=1206, Manufacturer=Yageo, Manufacturer Part Number=RC1206FR-07220RL, Max Operating Temperature=155°C, Min Operating Temperature=-55°C, Package Height=0.55mm, Package Length=3.1mm, Package Shape=Rectangular, Package Width=1.6mm, Power=250mW, Rated Temperature=70°C, Resistor Type="FIXED RESISTOR", Supplier Part Number=311-220FRCT-ND, Temperature Coefficient (ppm/Cel)=100, Tolerance=1%, Working Voltage=200V, Additional Feature="LASER TRIMMABLE", Category="Chip SMD Resistors", ComponentLink1Description=https://datasheet.ciiva.com:443/pdfs/VipMasterIC/IC/YAGO/YAGO-S-A0008145938/YAGO-S-A0008145938-1.pdf?src-supplier=IHS+Markit, ComponentLink1URL=https://datasheet.ciiva.com:443/pdfs/VipMasterIC/IC/YAGO/YAGO-S-A0008145938/YAGO-S-A0008145938-1.pdf?src-supplier=IHS+Markit, ComponentLink2Description=https://datasheet.ciiva.com/11808/0900766b80c6630a-11808955.pdf?src-supplier=Rs, ComponentLink2URL=https://datasheet.ciiva.com/11808/0900766b80c6630a-11808955.pdf?src-supplier=Rs, ComponentLink3Description=https://datasheet.ciiva.com/16957/pyu-rc1206-51-rohs-l-4-16957613.pdf?src-supplier=Future+Electronics, ComponentLink3URL=https://datasheet.ciiva.com/16957/pyu-rc1206-51-rohs-l-4-16957613.pdf?src-supplier=Future+Electronics, Construction=Chip, JESD-609 Code=e3, Mounting Technology="Surface Mount", Packaging="Tape and Reel", Pins=2, Pricing="1=0.1, 10=0.018, 100=0.0153, 1000=0.0102, 2500=0.00953 (USD)", Reach SVHC Compliant=Yes, RoHS=Yes, RoHS Compliant=Yes, Stock=103728, Supplier=Digikey, Technology="METAL GLAZE/THICK FILM", Terminal Finish=Nickel, Termination=Wraparound
RG RR: "Fixed Resistor, Metal Glaze/thick Film, 0.125W, 150ohm, 150V, 1% +/-Tol, 100ppm/Cel, Surface Mount, 0805", Case/Package=0805, Manufacturer=Yageo, Manufacturer Part Number=RC0805FR-07150RL, Max Operating Temperature=155°C, Min Operating Temperature=-55°C, Package Height=0.5mm, Package Length=2mm, Package Shape=Rectangular, Package Width=1.25mm, Power=125mW, Rated Temperature=70°C, Resistor Type="FIXED RESISTOR", Supplier Part Number=311-150CRCT-ND, Temperature Coefficient (ppm/Cel)=100, Tolerance=1%, Working Voltage=150V, Additional Feature="LASER TRIMMABLE", Category="Chip SMD Resistors", ComponentLink1Description=https://datasheet.ciiva.com:443/pdfs/VipMasterIC/IC/YAGO/YAGO-S-A0008145938/YAGO-S-A0008145938-1.pdf?src-supplier=IHS+Markit, ComponentLink1URL=https://datasheet.ciiva.com:443/pdfs/VipMasterIC/IC/YAGO/YAGO-S-A0008145938/YAGO-S-A0008145938-1.pdf?src-supplier=IHS+Markit, ComponentLink2Description=https://datasheet.ciiva.com/11819/0900766b8106beab-11819782.pdf?src-supplier=Rs, ComponentLink2URL=https://datasheet.ciiva.com/11819/0900766b8106beab-11819782.pdf?src-supplier=Rs, ComponentLink3Description=https://datasheet.ciiva.com/2456/pyu-r-int-thick-7-2456999.pdf?src-supplier=Digikey, ComponentLink3URL=https://datasheet.ciiva.com/2456/pyu-r-int-thick-7-2456999.pdf?src-supplier=Digikey, ComponentLink4Description=https://datasheet.ciiva.com/2457/pyu-r-int-thick-7-2457000.pdf?src-supplier=Digikey, ComponentLink4URL=https://datasheet.ciiva.com/2457/pyu-r-int-thick-7-2457000.pdf?src-supplier=Digikey, ComponentLink5Description=https://datasheet.ciiva.com/2457/pyu-r-int-thick-7-2457001.pdf?src-supplier=Digikey, ComponentLink5URL=https://datasheet.ciiva.com/2457/pyu-r-int-thick-7-2457001.pdf?src-supplier=Digikey, ComponentLink6Description=https://datasheet.ciiva.com/7660/38627-7660798.pdf?src-supplier=Element14, ComponentLink6URL=https://datasheet.ciiva.com/7660/38627-7660798.pdf?src-supplier=Element14, ComponentLink7Description=https://datasheet.ciiva.com/46447/444164-46447566.pdf?src-supplier=Element14, ComponentLink7URL=https://datasheet.ciiva.com/46447/444164-46447566.pdf?src-supplier=Element14, ComponentLink8Description=https://datasheet.ciiva.com/12668/rc0805-12668251.pdf?src-supplier=Mouser, ComponentLink8URL=https://datasheet.ciiva.com/12668/rc0805-12668251.pdf?src-supplier=Mouser, Construction=Chip, JESD-609 Code=e3, Mounting Technology="Surface Mount", Packaging="Tape and Reel", Pins=2, Pricing="1=0.1, 10=0.014, 100=0.0112, 1000=0.00918 (USD)", Reach SVHC Compliant=Yes, RoHS=Yes, RoHS Compliant=Yes, Stock=975966, Supplier=Digikey, Technology="METAL GLAZE/THICK FILM", Terminal Finish=Nickel, Termination=Wraparound
Rpot: "Potentiometer", LatestRevisionDate=17-Jul-2002, LatestRevisionNote="Re-released for DXP Platform.", PackageDescription="Variable Resistor, Thru-Hole; 3 Leads", PackageReference=VR5, Published=8-Jun-2000, Publisher="Altium Limited", Set Position=0.5, Sim Note="Enter the Resistance value and the set point into parameter fields."
Rser: "Fixed Resistor, Thin Film, 1W, 10ohm, 200V, 0.5% +/-Tol, 50ppm/Cel, Surface Mount, 1206", Case/Package=1206, Manufacturer=Susumu, Manufacturer Part Number=HRG3216Q-10R0-D-T1, Max Operating Temperature=155°C, Min Operating Temperature=-55°C, Package Height=0.4mm, Package Length=3.2mm, Package Width=1.6mm, Power=1W, Rated Temperature=70°C, Resistor Type="FIXED RESISTOR", Supplier Part Number 1=408-1869-1-ND, Temperature Coefficient (ppm/Cel)=50, Tolerance=0.5%, Working Voltage=200V, Additional Feature=ANTI-SULFUR, Category="Chip SMD Resistors", ComponentLink1Description=https://datasheet.ciiva.com:443/pdfs/VipMasterIC/IC/SUSU/SUSU-S-A0004582570/SUSU-S-A0004582570-1.pdf?src-supplier=IHS+Markit, ComponentLink1URL=https://datasheet.ciiva.com:443/pdfs/VipMasterIC/IC/SUSU/SUSU-S-A0004582570/SUSU-S-A0004582570-1.pdf?src-supplier=IHS+Markit, ComponentLink2Description=http://www.farnell.com/datasheets/2643250.pdf?src-supplier=Farnell, ComponentLink2URL=http://www.farnell.com/datasheets/2643250.pdf?src-supplier=Farnell, ComponentLink3Description=http://www.susumu.co.jp/common/pdf/n_catalog_partition24_en.pdf?src-supplier=Digikey, ComponentLink3URL=http://www.susumu.co.jp/common/pdf/n_catalog_partition24_en.pdf?src-supplier=Digikey, ComponentLink4Description=http://www.farnell.com/datasheets/2643250.pdf?src-supplier=Newark, ComponentLink4URL=http://www.farnell.com/datasheets/2643250.pdf?src-supplier=Newark, ComponentLink5Description=https://datasheet.octopart.com/HRG3216Q-10R0-D-T1-Susumu-datasheet-117013349.pdf?src-supplier=Future+Electronics, ComponentLink5URL=https://datasheet.octopart.com/HRG3216Q-10R0-D-T1-Susumu-datasheet-117013349.pdf?src-supplier=Future+Electronics, Construction=Rectangular, Mounting Technology="Surface Mount", Packaging="Tape and Reel", Pins=2, Pricing 1="1=0.64, 10=0.531, 50=0.465, 100=0.44, 500=0.36166 (USD)", Reach SVHC Compliant=Yes, Reference Standard=AEC-Q200, RoHS=Yes, RoHS Compliant=Yes, Stock 1=208868, Supplier 1=Digikey, Technology="THIN FILM", Termination=Wraparound
U1: library part CMP-05679-000026-1, "IC TXRX RS485/RS422 8-SOIC", Manufacturer="Maxim Integrated", Max Supply Voltage=5.25V, Min Supply Voltage=4.75V, Nominal Supply Current=300uA, Package=S8-2, Temperature="-40°C to +85°C", Temperature Range High=+85°C, Temperature Range Low=-40°C, Automotive=No, Category=IC, ComponentLink2Description=Datasheet, ComponentLink2URL=https://datasheets.maximintegrated.com/en/ds/MAX1487-MAX491.pdf, Data Rate=2.5Mbits/s, Device Class L1="Integrated Circuits (ICs)", Device Class L2="Interface ICs", Device Class L3="RS-232 / RS-422 / RS-485 Interface ICs", Digikey Description="IC TXRX RS485/RS422 8-SOIC", Footprint Url=https://pdfserv.maximintegrated.com/land_patterns/90-0096.PDF, Height=1.75mm, Interface=RS-485,RS-422, Lead Free=Yes, Manufacturer Part Number=MAX490ESA+, Mouser Description="MAX490 Series 2.5Mbps 12 V Full Duplex SMT RS 485 Transceiver - SOIC-8", Number Of Receivers=1, Number Of Transmitters=1, Octopart=https://octopart.com/max490esa%2B-maxim+integrated-39731914, RoHS=TRUE, Simplex Duplex="Full Duplex", Standoff Height=0.1mm
U2: "Analog Circuit, 1 Func, CMOS, PDSO16", Manufacturer="EM Microelectronic", Supplier Part Number 1=2651-EM4095HMSO16B+CT-ND, Category=LDO, ComponentLink1Description=https://datasheet.octopart.com/EM4095HMSO16B%2B-EM-Microelectronic-Marin-datasheet-112341807.pdf?src-supplier=TME, ComponentLink1URL=https://datasheet.octopart.com/EM4095HMSO16B%2B-EM-Microelectronic-Marin-datasheet-112341807.pdf?src-supplier=TME, Manufacturer Part Number=EM4095HMSO16B+, Pricing 1="1=4.25, 10=3.676, 25=3.476, 100=3.2005, 250=3.03532, 500=2.9187, 1000=2.80881 (USD)", RoHS=Yes, RoHS Compliant=Yes, Stock 1=52534, Supplier 1=Digikey

## Via types
v1: diameter 28, hole 14, Top Layer to Bottom Layer, 20 vias
v2: diameter 50, hole 28, Top Layer to Bottom Layer, 18 vias

## Nets (pads, with @x,y where several pads share a name; then routed paths per layer and width w, separated by ;. In a path a pad name is that pad's centre, name@x,y a point inside that pad or via, vN(x,y) a via of type N, cw(c..) or ccw(c..) an arc to the next point about the centre after c; other vN are vias at no path point)
3V3: H_PWR.5
5V: BZ1.P C1.1 C2.1 C3.1 C4.1 D3.2 EM4095_EXT.9 H_ICSP.2 H_LCD&DS.1 H_PWR.4 Motion_Sensor.3 R_A.2 RD.1 Rpot.2 RR.2 U1.3 U2.4 U2.7 | length 218.2
  Bottom Layer w20: C2.1 382.25,931.25 376.5,937 376.5,938.97 375.22,940.25 375.22,983.05 v1(374.02,984.25) 446.85,984.25 500,931.1 C4.1
  other v1: 1529.92,452.74 374.02,1122.05 342.42,1804.94
A: H_LCD&DS.7 R_A.1 | length 190.3
  Top Layer w20: H_LCD&DS.7 272.44,284.25 R_A.1
AD0: D1.1 H_AD.1 RG.2 | length 398.4
  Top Layer w20: RG.2 1970.75,385.49 2000,356.25 2000,326.61 ; H_AD.1 2000,326.61 ; D1.1 2000,326.61
AD1: H_AD.2 R3.1 | length 114.2
  Bottom Layer w20: R3.1 2058.09,187.9 2092.35,153.65 2092.35,107.65 H_AD.2
AD2: H_AD.3 Motion_Sensor.2 | length 760.6
  Top Layer w20: Motion_Sensor.2 2200,772.44 H_AD.3
AD3: EM4095_EXT.3 H_AD.4 U2.14 | length 2711.5
  Top Layer w10: 2303.15,492.13 2304.72,490.55
  Top Layer w20: U2.14 1960.37,922.05 1980.01,902.41 2247.19,902.41 2303.15,846.46 2303.15,551.18 ; H_AD.4 2303.15,103.15 2303.15,492.13 2303.15,551.18 ; EM4095_EXT.3@2495.28,492.13 EM4095_EXT.3 2365.35,488.98 2303.15,551.18
AD4: EM4095_EXT.4 H_AD.5 U2.12 | length 2874.8
  Top Layer w20: U2.12 599.12,1022.74 1219.59,1022.74 v2(1220.47,1023.62)
  Bottom Layer w16: 2401.57,590.55 2448.24,543.88 2543.52,543.88 EM4095_EXT.4
  Bottom Layer w20: v2(1220.47,1023.62) 2244.09,1023.62 2401.57,866.14 2401.57,590.55 2401.57,101.57 H_AD.5
AD5: EM4095_EXT.2 H_AD.6 U2.2 | length 3275.3
  Top Layer w20: U2.2 438.98,872.05 511.81,799.21 v2(511.81,688.98) ; v2(1003.94,629.92) 1003.94,39.37 1023.62,19.68 2488.28,19.68 2500,31.4 H_AD.6
  Bottom Layer w20: v2(511.81,688.98) 511.81,669.29 551.18,629.92 v2(1003.94,629.92) ; H_AD.6 2539.37,139.37 2539.37,310.24 EM4095_EXT.2@2619.68,390.55
ANT1: Rser.2 U2.3 | length 86
  Top Layer w20: Rser.2 331.89,922.05 U2.3
ANT2: Cres.1 U2.6 | length 92.3
  Top Layer w20: Cres.1@324.8,1062.99 333.17,1071.35 412.69,1071.35 U2.6
AREF: H_IOH.8
CDEC_IN: Cdec.1 U2.10 | length 119
  Top Layer w20: U2.10 625,1122.05 644.68,1141.73 669.29,1141.73 669.4,1141.84 Cdec.1
CDEC_OUT: Cdec.2 U2.9 | length 122.8
  Top Layer w20: U2.9 625,1172.05 653.74,1200.79 669.29,1200.79 669.4,1200.89 Cdec.2
DEMOD_IN: Cdv1.2 Cdv2.2 U2.8 | length 170.6
  Top Layer w20: Cdv1.2 333.19,1156.65 337.95,1161.42 354.33,1161.42 364.27,1171.35 412.69,1171.35 U2.8 413.39,1210.63 401.42,1222.6 395.51,1222.6 383.86,1234.25 Cdv2.2
EM4095_AGND: Cagnd.1 U2.11 | length 77.1
  Top Layer w20: U2.11 599.12,1071.35 668.91,1071.35 Cagnd.1
GND: C1.2 C2.2 C3.2 C4.2 Cagnd.2 Cdc2.2 Cdv2.1 Cfcap.2 D2.1 EM4095_EXT.10 H_ICSP.6 H_IOH.7 H_LCD&DS.3 H_LCD&DS.6 H_LCD&DS.8 H_PWR.2 H_PWR.3 K1.8 Motion_Sensor.1 Q1.2 R4.1 R5.1 Rpot.1 U1.6 U2.1 U2.5
  other v1: 571.06,339.46 473.38,339.81 1967.8,462.11 374.02,826.77 374.02,1023.62 751.55,1065.21 295.28,1240.16 443.67,1805.7
IO0: H_IOL.1 U1.4 | length 2522.5
  Top Layer w20: U1.4 325.2,1755.71 368.31,1712.6 531.5,1712.6 649.61,1830.71 649.61,2047.24 669.29,2066.93 2433.07,2066.93 H_IOL.1
IO1: H_IOL.2 U1.5 | length 2722.3
  Top Layer w20: U1.5 U1.5@519.29,1755.71 ; v2(649.61,1653.54) 651.16,1655.1 667.73,1655.1 944.88,1377.95 v2(1535.43,1377.95)
  Bottom Layer w20: v2(505.02,1755.71) 495.87,1755.71 492.13,1751.97 590.55,1653.54 v2(649.61,1653.54) ; v2(1535.43,1377.95) 2388.28,1377.95 2400,1389.67 H_IOL.2
IO2: H_IOL.3
IO3: H_IOL.4
IO4: H_IOL.5
IO5: H_IOL.6
IO6: H_IOL.7 K1.7 | length 1597.6
  Top Layer w20: K1.7 1220.47,1082.68 v2(1417.32,1082.68) ; v2(1751.97,1122.05) 1899.41,1269.49 H_IOL.7@1899.41,1999.41
  Bottom Layer w20: v2(1417.32,1082.68) 1712.6,1082.68 v2(1751.97,1122.05)
IO7: H_IOL.8
IO8: EM4095_EXT.1 H_IOH.1 U2.13 | length 4371.3
  Top Layer w10: 2671.31,905.51 2677.17,899.65
  Top Layer w20: U2.13 1365.75,972.05 1640,1246.3 H_IOH.1 ; v2(2145.67,1712.6) 2145.67,1200.79 2440.95,905.51 2671.31,905.51 ; EM4095_EXT.1 2572.44,314.96 2657.48,314.96 2677.17,334.65 2677.17,899.65
  Bottom Layer w20: v2(1633.86,1712.6) v2(2145.67,1712.6)
IO9: H_IOH.2
IO10: H_IOH.3
IO11: H_IOH.4
IO12: H_IOH.5 RD.2 | length 982.5
  Top Layer w20: RD.2 v2(1751.97,1909.45)
  Bottom Layer w20: H_IOH.5 1330.55,1909.45 v2(1751.97,1909.45)
IO13: H_IOH.6 Motion_Sensor.4 | length 1934.1
  Top Layer w20: Motion_Sensor.4@1997.21,982.95 1997.21,1914.34 v2(1998.19,1915.33)
  Bottom Layer w20: H_IOH.6 1140,1881.79 1151.72,1870.08 1733.36,1870.08 1734.99,1868.45 1768.95,1868.45 1815.83,1915.33 v2(1998.19,1915.33)
IOREF: H_PWR.7
M490_A: P1.3 R2.2 U1.2 | length 273.5
  Bottom Layer w20: v1(255.91,1850.39) 322.93,1850.39 354.33,1881.79 354.33,1982.74 314.96,2022.11 P1.3
M490_B: P1.4 R2.1 U1.1 | length 135.1
  Bottom Layer w20: P1.4 214.96,1950.39 v1(255.91,1909.45)
M490_Y: P1.1 R1.2 U1.7 | length 224.8
  Bottom Layer w20: P1.1 610.24,1932.28 610.24,1889.76 590.55,1870.08 570.87,1870.08
  other v1: 531.5,1850.39
M490_Z: P1.2 R1.1 U1.8 | length 166.4
  Bottom Layer w20: P1.2 414.96,2026.77 531.5,1910.24 v1(531.5,1909.45)
MISO: H_ICSP.1
MOSI: H_ICSP.4
NetBZ1_N: BZ1.N D3.1 Q1.3 | length 301.8
  Bottom Layer w20: D3.1 1730.12,452.76 1749.8,472.44 v1(1751.97,472.44) 1751.97,393.7 1791.34,354.33 Q1.3
NetCdc2_1: Cdc2.1 U2.16 | length 0.3
  Top Layer w20: U2.16@598.19,821.82 U2.16
  other v1: 629.92,807.09
NetCdv1_1: Cdv1.1 Cres.2 L1.1 | length 322.3
  Top Layer w20: L1.1 102.06,1186.13 148.4,1186.13 245.28,1089.25 Cres.2@251.19,1089.25 ; Cres.2 255.91,1078.63 255.91,1123.47 285.94,1153.51 Cdv1.1
NetCfcap_1: Cfcap.1 U2.15 | length 35.1
  Top Layer w16: U2.15 v1(633.51,872.04)
NetD1_2: D1.2 RR.1 | length 86.5
  Top Layer w20: RR.1 2136.28,468.66 2149.76,455.18 D1.2
NetD2_2: D2.2 RG.1 | length 91.1
  Top Layer w20: D2.2 1910.48,480.24 1910.48,392.62 RG.1
NetEM4095_EXT_5: EM4095_EXT.5
NetEM4095_EXT_6: EM4095_EXT.6
NetEM4095_EXT_7: EM4095_EXT.7
NetEM4095_EXT_8: EM4095_EXT.8
NetH_DR_7: H_DR.7
NetH_DR_8: H_DR.8
NetH_PWR_8: H_PWR.8
NetL1_2: L1.2 Rser.1 | length 248
  Top Layer w20: L1.2 89.76,787.4 157.48,787.4 222.44,852.36 Rser.1
NetQ1_1: Q1.1 R3.2 | length 159.5
  Bottom Layer w20: Q1.1 1830.55,238.35 1830.55,216.69 1850.39,196.85 R3.2
R_S3: H_LCD&DS.4 R4.2 | length 173.1
  Top Layer w20: H_LCD&DS.4@570.87,100 H_LCD&DS.4 571.65,99.21 571.65,267.85 R4.2
R_S4: H_LCD&DS.5 R5.2 | length 170.2
  Top Layer w20: H_LCD&DS.5 R5.2
RESET: H_ICSP.5 H_PWR.6 | length 2438.2
  Bottom Layer w16: H_PWR.6 1300,97.64 1377.95,19.68 2519.68,19.68 2677.17,177.17 2677.17,905.51 2657.48,925.2 2539.37,925.2 2511.74,952.82 2511.74,991.8 H_ICSP.5
S1_CH1: H_DR.5 K1.6 | length 660.2
  Bottom Layer w20: H_DR.5@1206.1,1766.34 1259.84,1712.6 1259.84,1622.14 1290.66,1591.32 1290.66,1270.98 1241.73,1222.05 K1.6
S1_CH2: H_DR.4 K1.5 | length 915.7
  Top Layer w20: H_DR.4 1250.84,1632.23 v1(1318.9,1632.23)
  Bottom Layer w20: v1(1318.9,1632.23) 1418.95,1632.23 1476.38,1574.8 1476.38,1296.06 K1.5
S1_IN: H_DR.6 K1.4 | length 352.8
  Top Layer w20: H_DR.6 1311.42,1760.55 1377.95,1694.02 1377.95,1497.64 K1.4
S2_CH1: H_DR.2 K1.3 | length 558.9
  Top Layer w20: H_DR.2 925.2,1771.65 964.57,1732.28 v2(964.57,1653.54) ; v2(1122.05,1653.54) 1127.79,1647.8 1147.47,1647.8 1241.73,1553.54 K1.3
  Bottom Layer w20: v2(964.57,1653.54) v2(1122.05,1653.54)
S2_CH2: H_DR.1 K1.2 | length 597.6
  Top Layer w20: H_DR.1 866.14,1716.93 v2(866.14,1594.49) ; v2(1123.4,1594.21) 1123.4,1586.09 1141.73,1567.76 K1.2
  Bottom Layer w20: v2(866.14,1594.49) 866.28,1594.35 1123.26,1594.35 v2(1123.4,1594.21)
S2_IN: H_DR.3 K1.1 | length 325.2
  Top Layer w20: H_DR.3@1012.52,1771.65 H_DR.3 1011.42,1760.55 1043.31,1728.66 1043.31,1462.99 K1.1
SCK: H_ICSP.3
SCL: H_IOH.10
SDA: H_IOH.9
VIN: H_PWR.1
VO: H_LCD&DS.2 Rpot.3 | length 2057.5
  Top Layer w20: Rpot.3 611.81,1514.17 v2(866.14,1259.84) ; H_LCD&DS.2 767.72,103.15 767.72,157.48 866.14,255.91 v2(866.14,787.4)
  Bottom Layer w20: v2(866.14,787.4) v2(866.14,1259.84)
pads on no net: BZ1.3 BZ1.4

## Polygon pours and split planes (outlines as drawn)
GND on Bottom Layer "GND_L02_P001" (solid, remove dead copper, pour order 1): 0,2106.3 2493.53,2106.3 2600.01,1999.82 2600.01,1599.97 2700.01,1499.97 2700.01,149.96 2699.96,149.96 2599.98,49.98 2600.01,49.96 2600.01,0 0,0
5V on Top Layer "5V_L01_P000" (solid, pour order 0): 0,2106.3 2493.53,2106.3 2600.01,1999.82 2600.01,1599.97 2700.01,1499.97 2700.01,149.96 2699.96,149.96 2599.98,49.98 2600.01,49.96 2600.01,0 0,0

## Keep-outs
Keep-Out Layer:
  rectangle: 0,728.35 255.91,1299.21

## Silkscreen, mask and mechanical layers (free items; w line width, h text height)
Top Overlay:
  the board outline again, w10
  text "SCL" at 742,1783 h40 r90
  text "SDA" at 842,1783 h40 r90
  text "AREF" at 942,1783 h40 r90
  text "GND" at 1042,1783 h40 r90
  text "IO13" at 1142,1783 h40 r90
  text "IO12" at 1242,1783 h40 r90
  text "IO11" at 1342,1783 h40 r90
  text "IO10" at 1442,1783 h40 r90
  text "IO9" at 1542,1783 h40 r90
  text "IO8" at 1642,1783 h40 r90
  text "IO7" at 1817,1783 h40 r90
  text "IO6" at 1917,1783 h40 r90
  text "IO5" at 2017,1783 h40 r90
  text "IO4" at 2117,1783 h40 r90
  text "IO3" at 2217,1783 h40 r90
  text "IO2" at 2317,1783 h40 r90
  text "IO1" at 2417,1783 h40 r90
  text "IO0" at 2517,1783 h40 r90
  text "H_IOH" at 561.18,1634.17 h60
  text "IOREF" at 1217,208 h40 r90
  text "RESET" at 1317,208 h40 r90
  text "3V3" at 1417,208 h40 r90
  text "5V" at 1517,208 h40 r90
  text "GND" at 1617,208 h40 r90
  text "GND" at 1717,208 h40 r90
  text "Vin" at 1817,208 h40 r90
  text "AD0" at 2017,208 h40 r90
  text "AD1" at 2117,208 h40 r90
  text "AD2" at 2217,208 h40 r90
  text "AD3" at 2317,208 h40 r90
  text "AD4" at 2417,208 h40 r90
  text "AD5" at 2517,208 h40 r90
Bottom Overlay:
  text "SCL" at 742,2242 h40 r90
  text "SDA" at 842,2242 h40 r90
  text "AREF" at 942,2242 h40 r90
  text "GND" at 1042,2242 h40 r90
  text "IO13" at 1142,2242 h40 r90
  text "IO12" at 1242,2242 h40 r90
  text "IO11" at 1342,2242 h40 r90
  text "IO10" at 1442,2242 h40 r90
  text "IO9" at 1542,2242 h40 r90
  text "IO8" at 1642,2242 h40 r90
  text "IO7" at 1817,2242 h40 r90
  text "IO6" at 1917,2242 h40 r90
  text "IO5" at 2017,2242 h40 r90
  text "IO4" at 2117,2242 h40 r90
  text "IO3" at 2217,2242 h40 r90
  text "IO2" at 2317,2242 h40 r90
  text "IO1" at 2417,2242 h40 r90
  text "IO0" at 2517,2242 h40 r90
  text "K" at 1011.94,1858.39 h40 r270
  text "A" at 1110.36,1858.39 h40 r270
  text "RW" at 913.51,1838.71 h40 r270
  text "VO" at 1385.95,1641.86 h40 r270
  text "VSS" at 1484.38,1602.49 h40 r270
  text "VDD" at 1608,1583 h40 r270
  text "12V" at 2483,1583 h40 r270
  text "R_S4" at 1195.77,1563.12 h40 r270
  text "R_S3" at 1294.19,1563.12 h40 r270
  text "S2_NC" at 1789.66,1508 h40 r270
  text "S2_NO" at 1889.66,1508 h40 r270
  text "S2_IN" at 1989.66,1508 h40 r270
  text "S1_NC" at 2089.66,1508 h40 r270
  text "S1_NO" at 2189.66,1508 h40 r270
  text "S1_IN" at 2289.66,1508 h40 r270
  text "12VGND" at 2383,1458 h40 r270
  text "RESET" at 1317,17 h40 r90
  text "IOREF" at 1217,-8 h40 r90
  text "3V3" at 1417,-58 h40 r90
  text "5V" at 1517,-58 h40 r90
  text "GND" at 1617,-58 h40 r90
  text "GND" at 1717,-58 h40 r90
  text "Vin" at 1817,-58 h40 r90
  text "AD0" at 2017,-58 h40 r90
  text "AD1" at 2117,-58 h40 r90
  text "AD2" at 2217,-58 h40 r90
  text "AD3" at 2317,-58 h40 r90
  text "AD4" at 2417,-58 h40 r90
  text "AD5" at 2517,-58 h40 r90

## Text inside footprints (layer, text, board x,y; h text height)
EM4095_EXT: Bottom Overlay "10" at 2578.43,848.98 h50 r270; Bottom Overlay "9" at 2478.43,848.98 h50 r270; Bottom Overlay "1" at 2478.43,308.98 h50 r270; Bottom Overlay "2" at 2578.43,288.98 h50 r270